# Altium PCB PCB1.PcbDoc
Units mil, origin at the board's own origin, x right, y up, seen from the top; angles counter-clockwise.
Board outline 1184.59 x 1334 mil, 2 copper layers (Top Layer, Bottom Layer); 18 components, 27 nets, 113 pads, 83 vias.
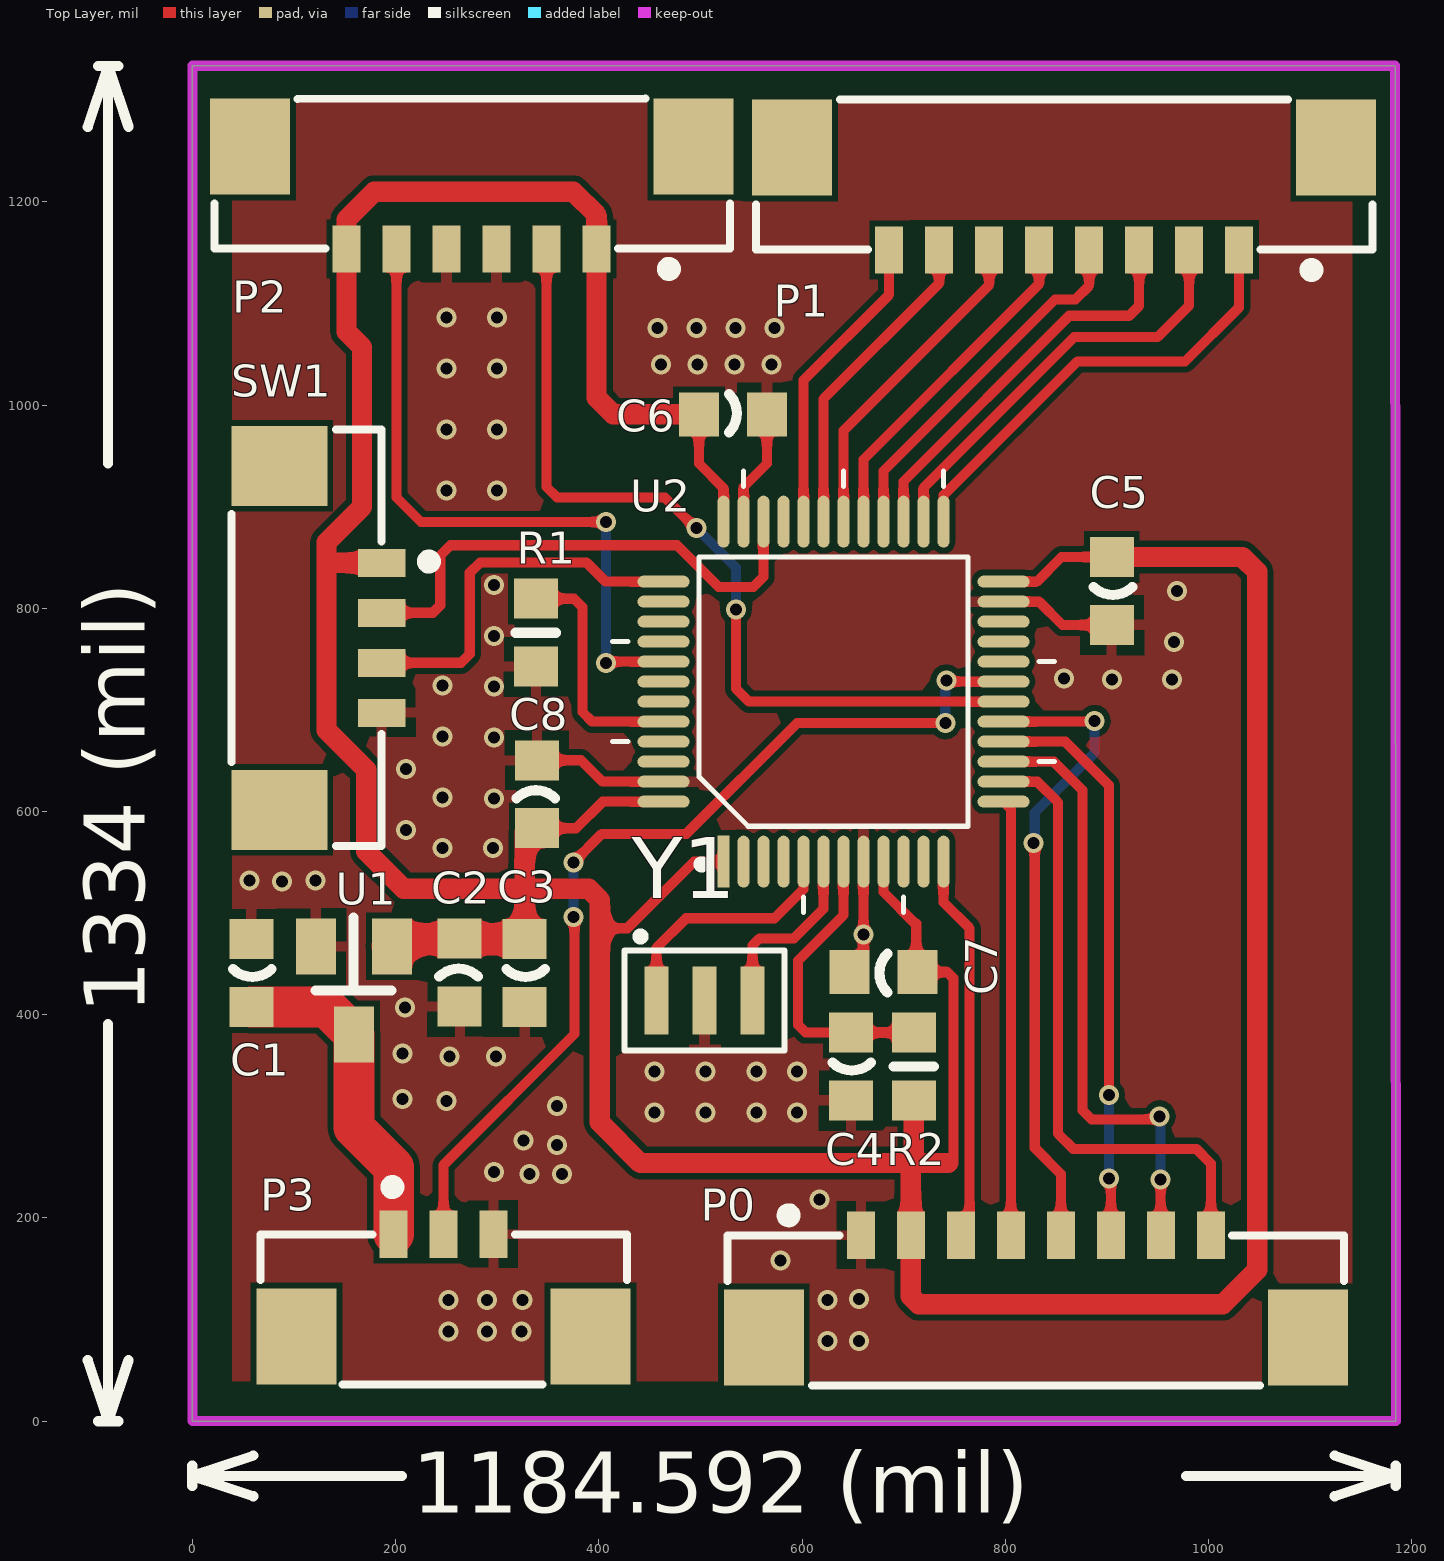
[diagram p0: Top Layer view]
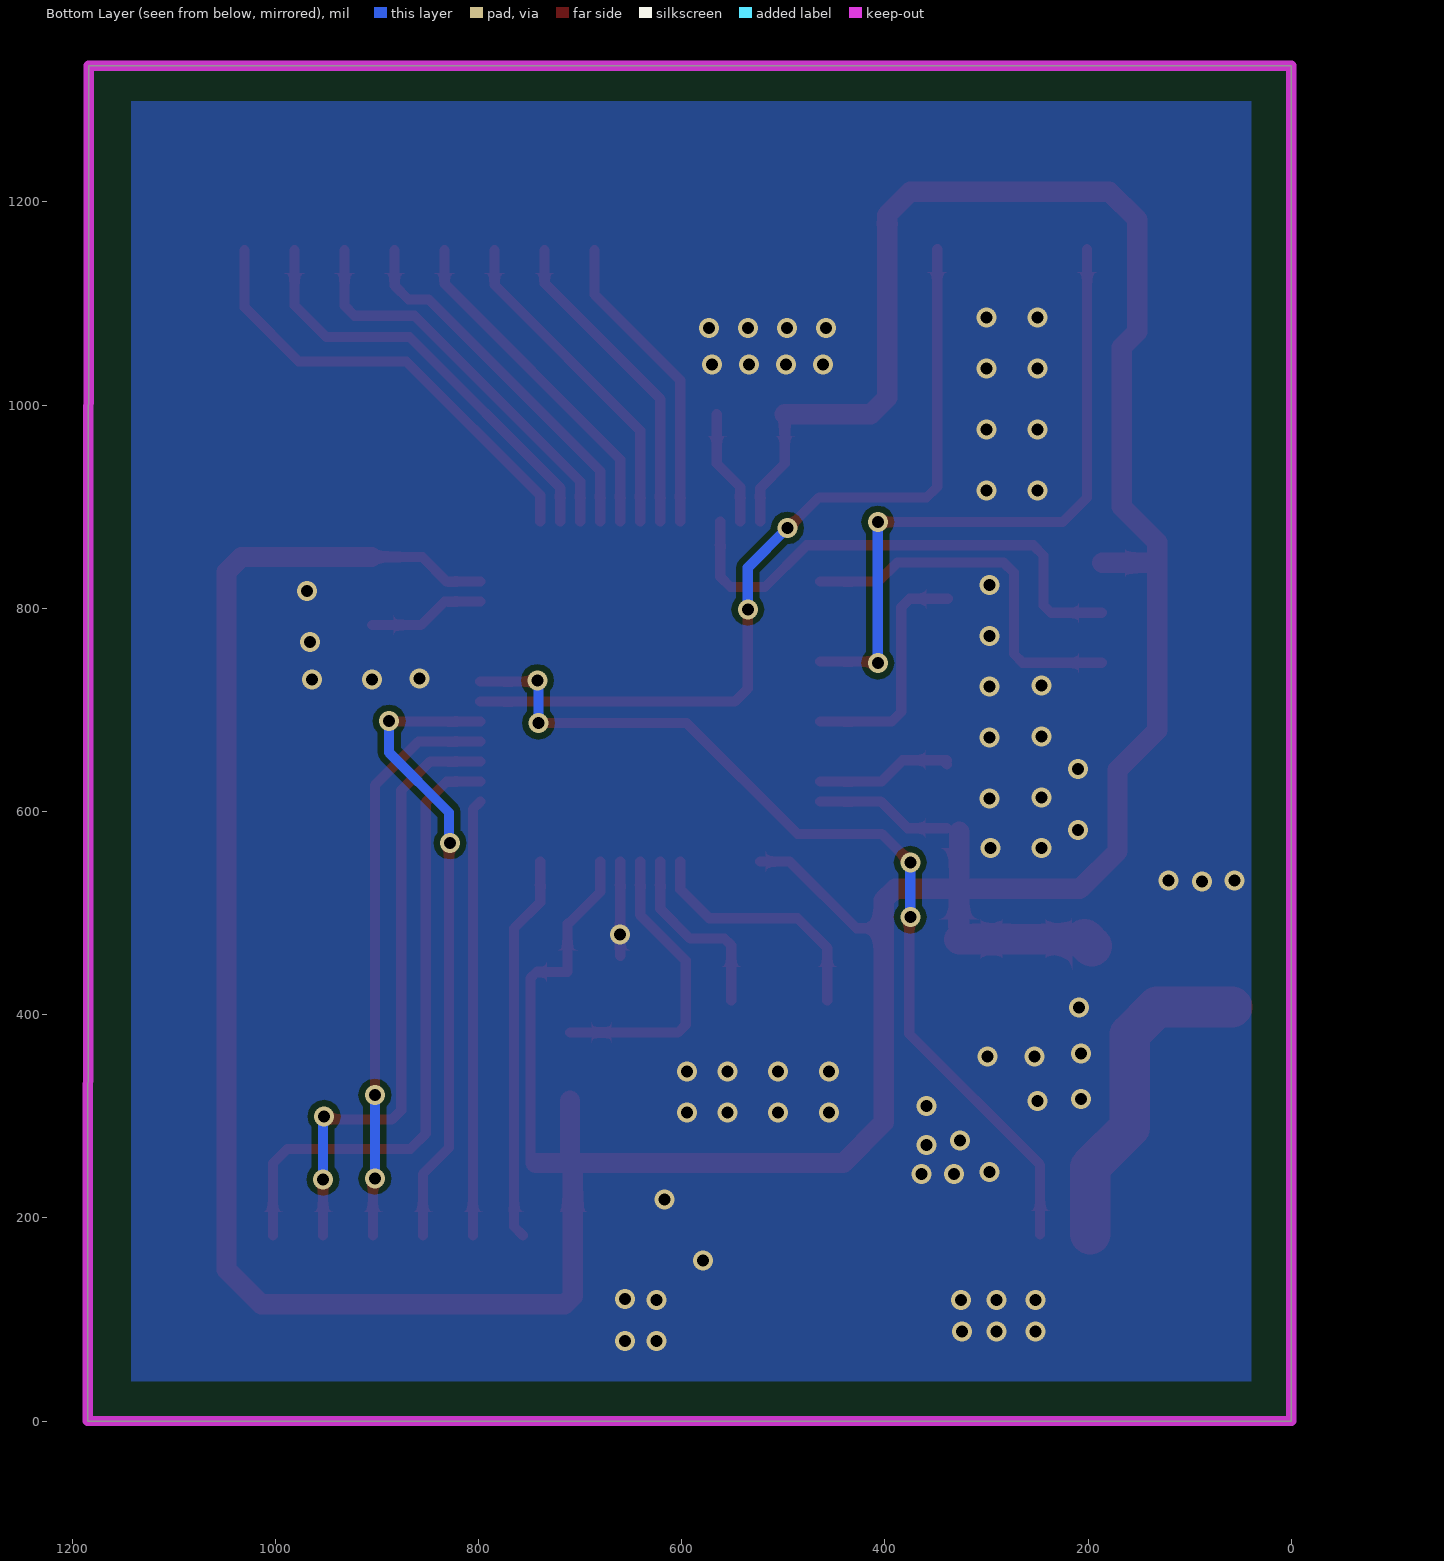
[diagram p1: Bottom Layer view, seen from below]

## Layer stack, top to bottom
Top Solder: solder mask 0.4, Solder Resist, Dk 3.5
Top Layer: signal copper 1.4
Dielectric 1: dielectric 12.6, FR-4, Dk 4.8
Bottom Layer: signal copper 1.4
Bottom Solder: solder mask 0.4, Solder Resist, Dk 3.5

## Board outline
0,0 0,1334 1183.66,1334 1184.59,0

## Design rules (kind name [scope] priority, off if disabled: settings)
Clearance [All] p1: gap=6
ComponentClearance [All] p1: gap=10 collisioncheckmode=3 verticalgap=0 showdistances=FALSE
HoleToHoleClearance [All] p1: gap=0 allowstackedmicrovias=TRUE
MinimumSolderMaskSliver [All] p1: minsoldermaskwidth=0
PolygonConnect PolygonConnect_1 [All vs IsVia] p1: connectstyle=Direct reliefconductorwidth=10 reliefentries=4 polygonreliefangle="90 Angle" airgapwidth=10
PolygonConnect [All] p2: connectstyle=Relief reliefconductorwidth=10 reliefentries=4 polygonreliefangle="90 Angle" airgapwidth=10
RoutingVias [All] p1: holewidth=28 width=50 viastyle="Through Hole" minholewidth=11.81 minwidth=19.68 maxholewidth=28 maxwidth=50
SilkToSilkClearance [All] p1: silktosilkclearance=0
SilkToSolderMaskClearance [IsPad] p1: minsilkscreentomaskgap=0 clearancetoexposedcopper=TRUE
SolderMaskExpansion [All] p1: expansion=4
Width [All] p1: maxlimit=50 minlimit=6 preferedwidth=10
25 further rules are at their usual default settings.

## Components (designator, comment, footprint, x,y, rotation, side; value= is the part's Value field where it differs from the comment)
C1 "100n" C0603 58,441 r90 top
C2 "100n" C0603 263,441.46 r270 top
C3 "10UF" C0603 327,441 r90 top
C4 "0.1uF" C0603 648,349 r90 top
C5 "10UF" C0603 905,817 r90 top
C6 "0.1uF" C0603 532,991 r180 top
C7 "0.1uF" C0603 680,442 r0 top
C8 "0.1uF" C0603 339,617 r270 top
P0 "OLED" DF13-1.25-8A 830.18,132.61 r0 top
P1 "云台" DF13-1.25-8A 858,1203 r180 top
P2 "Header 6" DF13-1.25-6A 275,1204 r180 top
P3 "Header 3" DF13-1.25-3A 271.82,133.61 r0 top
R1 "10K" R0603 338,776 r90 top
R2 "10K" R0603 710,349 r270 top
SW1 "CON4" DF13-1.25-4A 136,771 r270 top
U1 "3.3V" SOT23 159,424 r180 top
U2 "STM32F103C8" ST_LQFP48 631,718 r90 top
Y1 "CSTCE8M00G55R0" CRYSMD3.2X1.3 504,414 r0 top

## Footprints (in the part's own frame and the unit in brackets; to place one, negate y for a bottom-side part, rotate by r counter-clockwise, add the part's x,y. Pads: shape width x height; smd on the part's side, far side on the other; paste and mask are expansions set on the pad)
C0603 [mm] "C0603"
  rect 1x1.1 smd: 1(-0.85,0) 2(0.85,0)
  Top Layer pour cut-out: -0.356,0.533 -0.356,-0.533 0.356,-0.533 0.356,0.533
  silkscreen extent -0.1,-0.51 0.1,0.46
CRYSMD3.2X1.3 [mm]
  rect 0.6x1.7 smd: 1(-1.2,0) 2(0,0) 3(1.2,0)
  Top Layer pour cut-out: 1.981,1.245 0.406,1.245 0.406,-1.245 1.956,-1.245 1.981,-1.219
  Top Layer pour cut-out: -2.007,1.245 -0.381,1.245 -0.381,-1.27 -2.007,-1.27
  silkscreen extent -2,-1.25 2,1.7
DF13-1.25-3A [mm] "佳能"
  rect 0.7x1.18 smd: 1(-1.875,1.28) 2(-0.625,1.28) 3(0.625,1.28)
  rect 2x2.4 smd: NC(-4.3,-1.28) NC(3.05,-1.28)
  silkscreen extent -5.21,-2.48 3.96,2.61
DF13-1.25-4A [mm] "佳能"
  rect 0.7x1.18 smd: 1(-1.875,1.28) 2(-0.625,1.28) 3(0.625,1.28) 4(1.875,1.28)
  rect 2x2.4 smd: NC(-4.3,-1.28) NC(4.3,-1.28)
  silkscreen extent -5.21,-2.48 5.21,2.61
DF13-1.25-6A [mm]
  rect 0.7x1.18 smd: 1(-3.119,1.28) 2(-1.869,1.28) 3(-0.619,1.28) 4(0.631,1.28) 5(1.881,1.28) 6(3.131,1.28)
  rect 2x2.4 smd: NC(-5.544,-1.28) NC(5.544,-1.28)
  silkscreen extent -6.45,-2.48 6.44,1.93
DF13-1.25-8A [mm]
  rect 0.7x1.18 smd: 1(-4.375,1.28) 2(-3.125,1.28) 3(-1.875,1.28) 4(-0.625,1.28) 5(0.625,1.28) 6(1.875,1.28) 7(3.125,1.28) 8(4.375,1.28)
  rect 2x2.4 smd: NC(-6.8,-1.28) NC(6.8,-1.28)
  silkscreen extent -7.71,-2.48 7.71,1.93
R0603 [mm] "R0603"
  rect 1x1.1 smd: 1(-0.85,0) 2(0.85,0)
  Top Layer pour cut-out: -0.356,0.533 -0.356,-0.533 0.356,-0.533 0.356,0.533
  silkscreen extent 0,-0.51 0,0.51
SOT23 [mm] "SOT23"
  rect 1x1.4 smd: 1(0.95,-1.1) 2(-0.95,-1.1) 3(0,1.1)
  silkscreen extent -0.94,-1.82 0.97,0
ST_LQFP48 [mm]
  rect 1.3x0.3 smd: 1(-4.25,2.75)
  oval 1.3x0.3 smd: 2(-4.25,2.25) 3(-4.25,1.75) 4(-4.25,1.25) 5(-4.25,0.75) 6(-4.25,0.25) 7(-4.25,-0.25) 8(-4.25,-0.75) 9(-4.25,-1.25) 10(-4.25,-1.75) 11(-4.25,-2.25) 12(-4.25,-2.75) 25(4.25,-2.75) 26(4.25,-2.25) 27(4.25,-1.75) 28(4.25,-1.25) 29(4.25,-0.75) 30(4.25,-0.25) 31(4.25,0.25) 32(4.25,0.75) 33(4.25,1.25) 34(4.25,1.75) 35(4.25,2.25) 36(4.25,2.75)
  oval 0.3x1.3 smd: 13(-2.75,-4.25) 14(-2.25,-4.25) 15(-1.75,-4.25) 16(-1.25,-4.25) 17(-0.75,-4.25) 18(-0.25,-4.25) 19(0.25,-4.25) 20(0.75,-4.25) 21(1.25,-4.25) 22(1.75,-4.25) 23(2.25,-4.25) 24(2.75,-4.25) 37(2.75,4.25) 38(2.25,4.25) 39(1.75,4.25) 40(1.25,4.25) 41(0.75,4.25) 42(0.25,4.25) 43(-0.25,4.25) 44(-0.75,4.25) 45(-1.25,4.25) 46(-1.75,4.25) 47(-2.25,4.25) 48(-2.75,4.25)
  silkscreen extent -5.52,-5.52 5.52,5.52

## Part data
C1 C2: library part C-EUC0603, "CAPACITOR, European symbol"
C3 C4 C5 C6 C7 C8: library part Cap, "Capacitor"
P0 P1: library part "Header 8", "Header, 8-Pin"
P2: "Header, 6-Pin"
P3: "Header, 3-Pin"
R1 R2: library part Res2, "Resistor"
U1: library part XC6206
Y1: library part XTAL-3

## Via types
v1: diameter 19.68, hole 11.81, Top Layer to Bottom Layer, 83 vias

## Nets (pads, with @x,y where several pads share a name; then routed paths per layer and width w, separated by ;. In a path a pad name is that pad's centre, name@x,y a point inside that pad or via, vN(x,y) a via of type N, cw(c..) or ccw(c..) an arc to the next point about the centre after c; other vN are vias at no path point)
BL: P0.3 U2.12 | length 381.9
  Top Layer w10: U2.12 739.27,510.73 765,485 765,191.63 P0.3
CS: P0.8 U2.14 | length 621.3
  Top Layer w10: U2.14 831.58,629.42 852,609 852,283 867,268 988,268 1002.42,253.58 P0.8
GND: C1.2 C2.2 C3.1 C4.1 C5.1 C6.1 C7.1 C8.1 P0.1 P2.3 P2.4 P3.3 R1.1 SW1.4 U1.1 U2.8 U2.23 U2.35 U2.47 Y1.2 | length 463.2
  Top Layer w10: C8.1@339,646.46 C8.1@343,650.46 ; C8.1 C8.1@343,650.46 ; U2.47 403.58,629.42 382.54,650.46 C8.1@343,650.46 ; U2.35 542.42,919.42 565.46,942.46 C6.1 ; C7.1@660.53,457.99 v1(660.53,479) U2.8 ; U2.23 833.42,806.58 856.46,783.54 C5.1
  other v1: 625,79 656,79 252,88 290,88 324,88 252,119 290,119 325,119 625,119 656,120 579,158 617,218 332,243 364,243 297,245 359,272 326,276 455,304 505,304 555,304 595,304 359,310 250,315 207,317 455,344 505,344 555,344 595,344 253,359 299,359 207,362 209,407 88,531 56,532 121,532 246,564 296,564 210,582 297,613 246,614 210,642 297,673 246,674 297,723 246,724 905,730 964,730 858,731 966,767 297,773 969,817 297,823 250,916 300,916 250,976 300,976 250,1036 300,1036 461,1040 497.33,1040 533.67,1040 570,1040 458,1076 496.33,1076 534.67,1076 573,1076 250,1086 300,1086
MISO: P0.6 U2.16 | length 565.2
  Top Layer w10: U2.16 859.21,668.79 902,626 v1(902,321) ; v1(902,239) 904,237 P0.6
  Bottom Layer w10: v1(902,239) v1(902,321)
MOSI: P0.5 U2.17 | length 631.8
  Top Layer w10: U2.17 887.47,688.47 v1(888,689) ; v1(828,569) 829,568 829,269 854.79,243.21 P0.5
  Bottom Layer w10: v1(828,569) 829,570 829,599 888,658 v1(888,689)
NetR1_2: R1.2 U2.44 | length 236.1
  Top Layer w10: R1.2 375.54,809.46 384,801 384,698 393.53,688.47 U2.44
NetU2_5: U2.5 Y1.1 | length 247.6
  Top Layer w10: Y1.1 456.76,465.76 486,495 573,495 601.47,523.47 U2.5
NetU2_6: U2.6 Y1.3 | length 185.6
  Top Layer w10: Y1.3 551.24,468.24 558,475 592,475 621.16,504.16 U2.6
PA8: P1.5 U2.29 | length 338.9
  Top Layer w10: U2.29 660.53,946.53 833.39,1119.39 P1.5
PA11: P1.8 U2.32 | length 302.2
  Top Layer w10: U2.32 601.47,1024.47 685.76,1108.76 P1.8
PA12: U2.33
PB12: P1.1 U2.25 | length 449.9
  Top Layer w10: U2.25 739.27,911.27 871,1043 977,1043 1030.24,1096.24 P1.1
PB13: P1.2 U2.26 | length 423.6
  Top Layer w10: U2.26 719.58,918.58 868,1067 950,1067 981.02,1098.02 P1.2
PB14: P1.3 U2.27 | length 397.9
  Top Layer w10: U2.27 699.9,924.9 863,1088 922,1088 931.81,1097.81 P1.3
PB15: P1.4 U2.28 | length 362.8
  Top Layer w10: U2.28 680.21,935.21 849,1104 869,1104 882.6,1117.6 P1.4
POT: P2.2 U2.18 | length 841.1
  Top Layer w10: P2.2 348.57,919.43 359,909 465,909 495,879 v1(496,879) ; v1(535,799) 535,721 547.84,708.16 U2.18
  Bottom Layer w10: v1(496,879) 535,840 v1(535,799)
PWN0: P3.2 U2.19 | length 942.9
  Top Layer w10: P3.2 247.22,252.22 376,381 376,496 v1(375,496) ; v1(375,550) 403,578 486,578 595,687 v1(741,687) ; v1(742,729) 743.16,727.84 U2.19
  Bottom Layer w10: v1(375,496) v1(375,550) ; v1(741,687) 741,729 v1(742,729)
REST1: C4.2 R2.1 U2.7 | length 295.4
  Top Layer w10: U2.7 640.84,498 596,453.16 596,390 603.54,382.46 C4.2@647,382.46 ; C4.2 R2.1
RS: P0.4 U2.13 | length 429.7
  Top Layer w10: U2.13 805.58,602.48 P0.4
RX1: P1.7 U2.31 | length 314.4
  Top Layer w10: U2.31 621.16,1006.16 734.97,1119.97 P1.7
SCK: P0.7 U2.15 | length 605.1
  Top Layer w10: U2.15 847.9,649.1 876,621 876,306 885,297 952,297 v1(952,300) ; v1(953,238) 953,183.21 P0.7
  Bottom Layer w10: v1(952,300) 953,300 v1(953,238)
SPEED: P2.5 U2.41 | length 656.9
  Top Layer w10: P2.5 200.94,909.06 225,885 v1(407,885) ; v1(407,746) 408.53,747.53 U2.41
  Bottom Layer w10: v1(407,746) v1(407,885)
SWCLK: SW1.3 U2.37 | length 372.7
  Top Layer w10: SW1.3 264.4,746.39 273,755 273,835 283,845 388,845 406.73,826.27 U2.37
SWDIO: SW1.2 U2.34 | length 507.3
  Top Layer w10: SW1.2 236.6,795.61 244,803 244,852 254,862 477,862 518,821 552,821 562.1,831.1 U2.34
TX1: P1.6 U2.30 | length 326.7
  Top Layer w10: U2.30 640.84,974.84 784.18,1118.18 P1.6
VDD_3V3: C2.1 C3.2 C5.2 C6.2 C7.2 C8.2 P0.2 P2.1 P2.6 R2.2 SW1.1 U1.2 U2.1 U2.9 U2.24 U2.36 U2.48 | length 4585
  Top Layer w10: C8.2 377.54,583.54 403.73,609.73 U2.48 ; 401,485 428,485 493.68,550.68 U2.1 ; C6.2 498.54,942.46 522.73,918.27 U2.36 ; U2.9 680.21,520.79 711.46,489.54 ; C7.2@712.46,442 712.46,489.54 ; C7.2 743,442 749,436 749,254 ; U2.24 831.27,826.27 855.46,850.46 C5.2
  Top Layer w20: SW1.1 135.18,844.83 132,848 ; C3.2 327,524 ; C8.2@327,580 327,524 ; C6.2 414,991 397.79,1007.21 P2.1 397.79,1187.21 375,1210 179,1210 151.73,1182.73 P2.6 151.73,1072.27 167,1057 167,900 132,865 132,848 ; R2.2 710,259 715,254 ; 744,254 715,254 ; C5.2 1033.54,850.46 1048,836 1048,149 1014,115 715,115 707.16,122.84 P0.2 707.16,250.84 704,254 ; 132,848 132,680 171,641 171,561 208,524 327,524 ; 327,524 390,524 401,513 401,485 401,294 441,254 704,254 ; 704,254 715,254
  Top Layer w30: U1.2@203.55,474.46 C3.2
  Top Layer w40: U1.2 U1.2@203.55,474.46
VIN: C1.1 P3.1 U1.3 | length 325
  Top Layer w40: C1.1 132.15,407.54 U1.3 159,289 198,250 P3.1
pads on no net: P0.NC P1.NC P2.NC P3.NC SW1.NC U2.2 U2.3 U2.4 U2.10 U2.11 U2.20 U2.21 U2.22 U2.38 U2.39 U2.40 U2.42 U2.43 U2.45 U2.46

## Polygon pours and split planes (outlines as drawn)
GND on Top Layer "TGND" (solid, remove dead copper, pour order 0): 39.37,39.37 1141.73,39.37 1141.73,1299.21 39.37,1299.21 39.37,39.37
GND on Bottom Layer "BGND" (solid, remove dead copper, pour order 2): 39.37,39.37 1141.73,39.37 1141.73,1299.21 39.37,1299.21 39.37,39.37

## Keep-outs
Keep-Out Layer:
  the board outline again, w10

## Silkscreen, mask and mechanical layers (free items; w line width, h text height)
Top Overlay:
  lines w10: -102.99,59.9 -82.99,-0.1 ; -102.99,1273.9 -82.99,1333.9 ; -92.99,-0.1 -72.99,-0.1 ; -92.99,1333.9 -72.99,1333.9 ; -82.99,390.99 -82.99,-0.1 ; -82.99,942.82 -82.99,1333.9 ; -62.99,59.9 -82.99,-0.1 ; -62.99,1273.9 -82.99,1333.9 ; -0.2,-64 -0.2,-44 ; 59.8,-74 -0.2,-54 ; 59.8,-34 -0.2,-54 ; 206.22,-54 -0.2,-54 ; 977.98,-54 1184.39,-54 ; 1124.39,-74 1184.39,-54 ; 1124.39,-34 1184.39,-54 ; 1184.39,-64 1184.39,-44
  text "1334 (mil)" at -47,400.99 h60 r90
  text "1184.592 (mil)" at 216.22,-89.99 h60